# Altium PCB PCB.PcbDoc
Units mm, origin at the board's own origin, x right, y up, seen from the top; angles counter-clockwise.
Board outline 36 x 35 mm, 2 copper layers (Top Layer, Bottom Layer), stack 0.324 mm thick; 25 components, 36 nets, 102 pads, 19 vias.
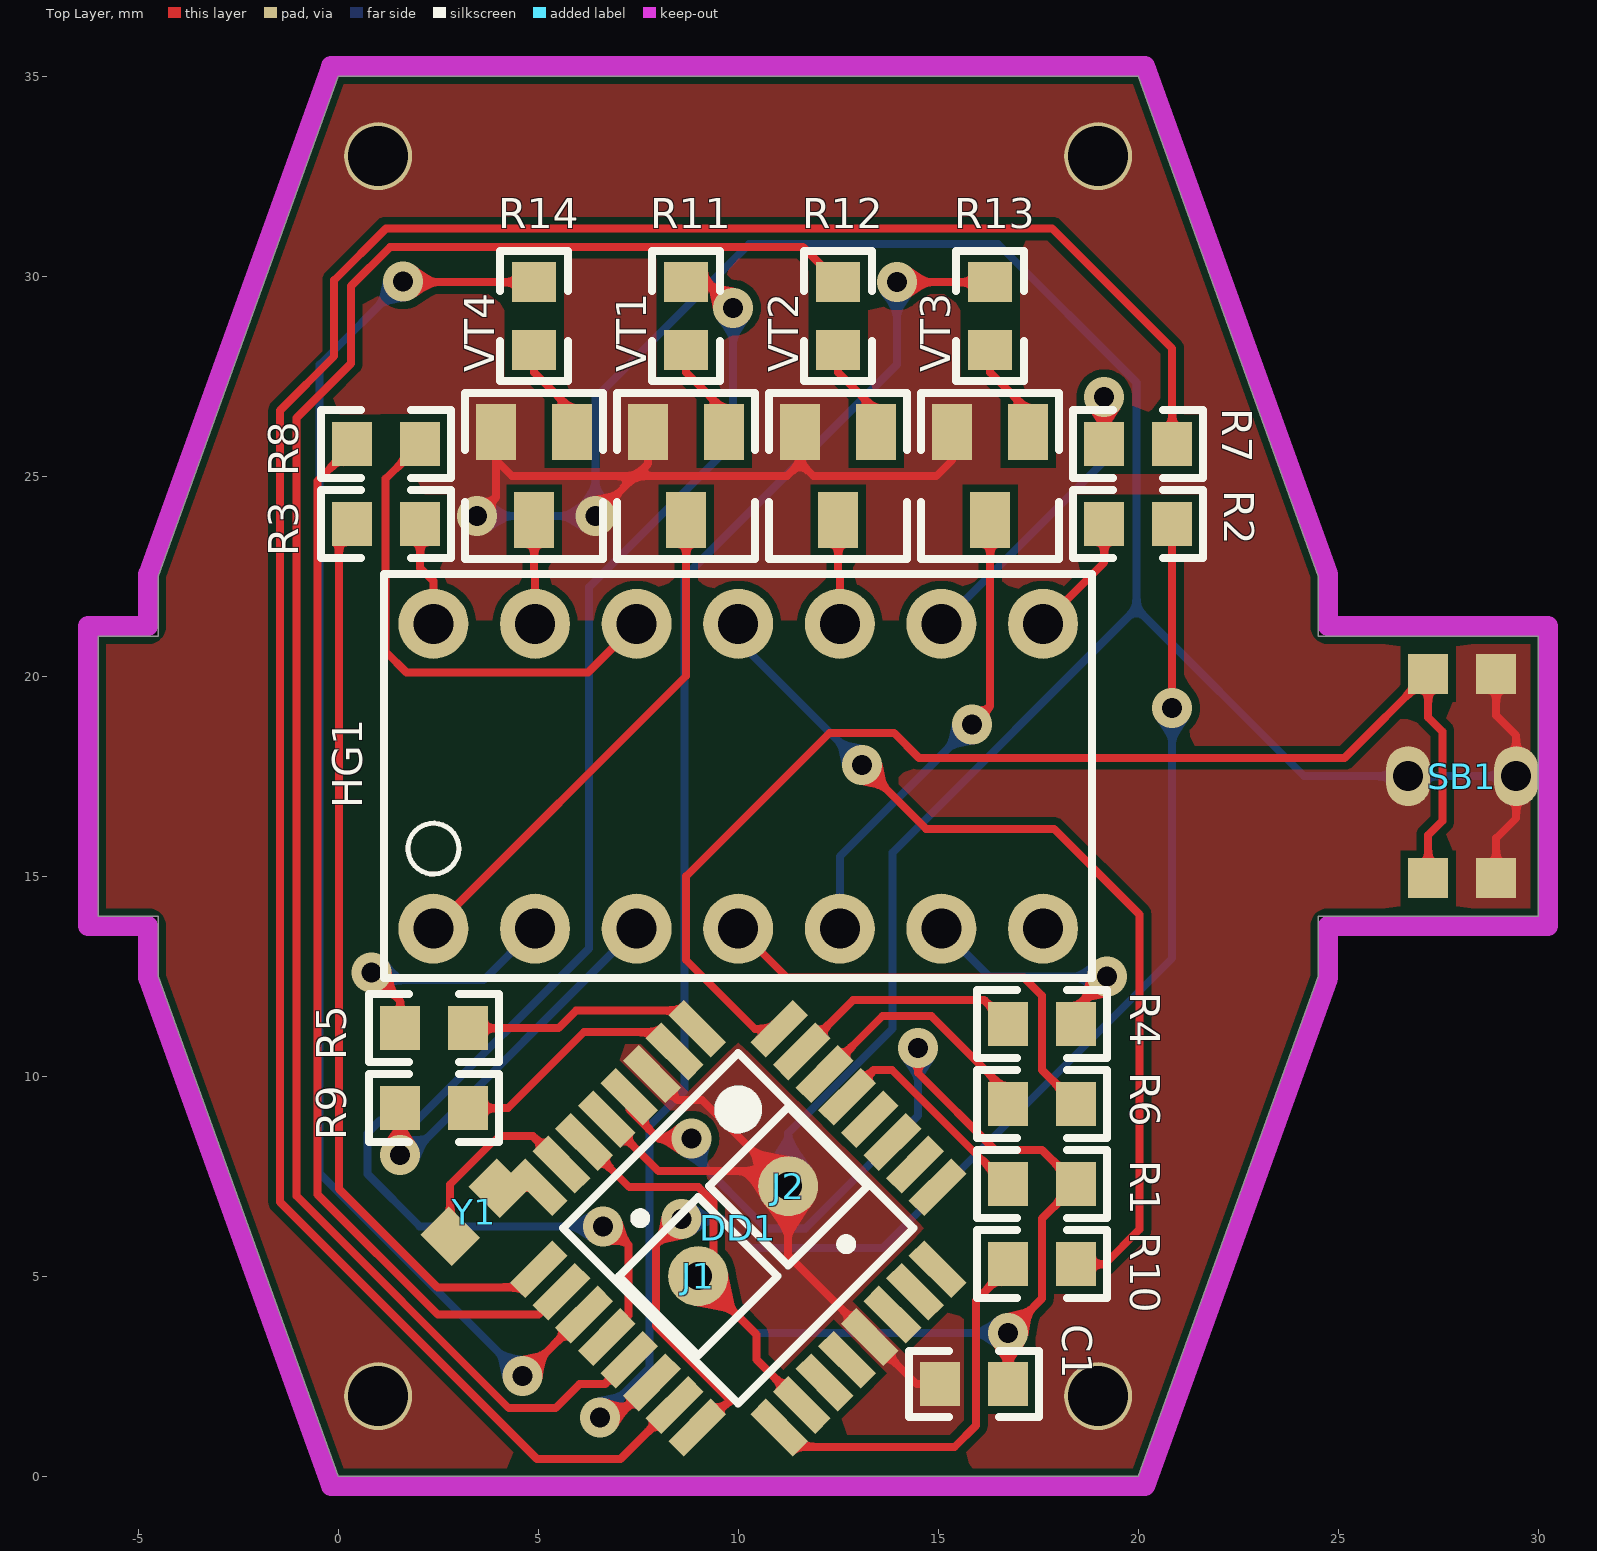
[diagram p0: Top Layer view]
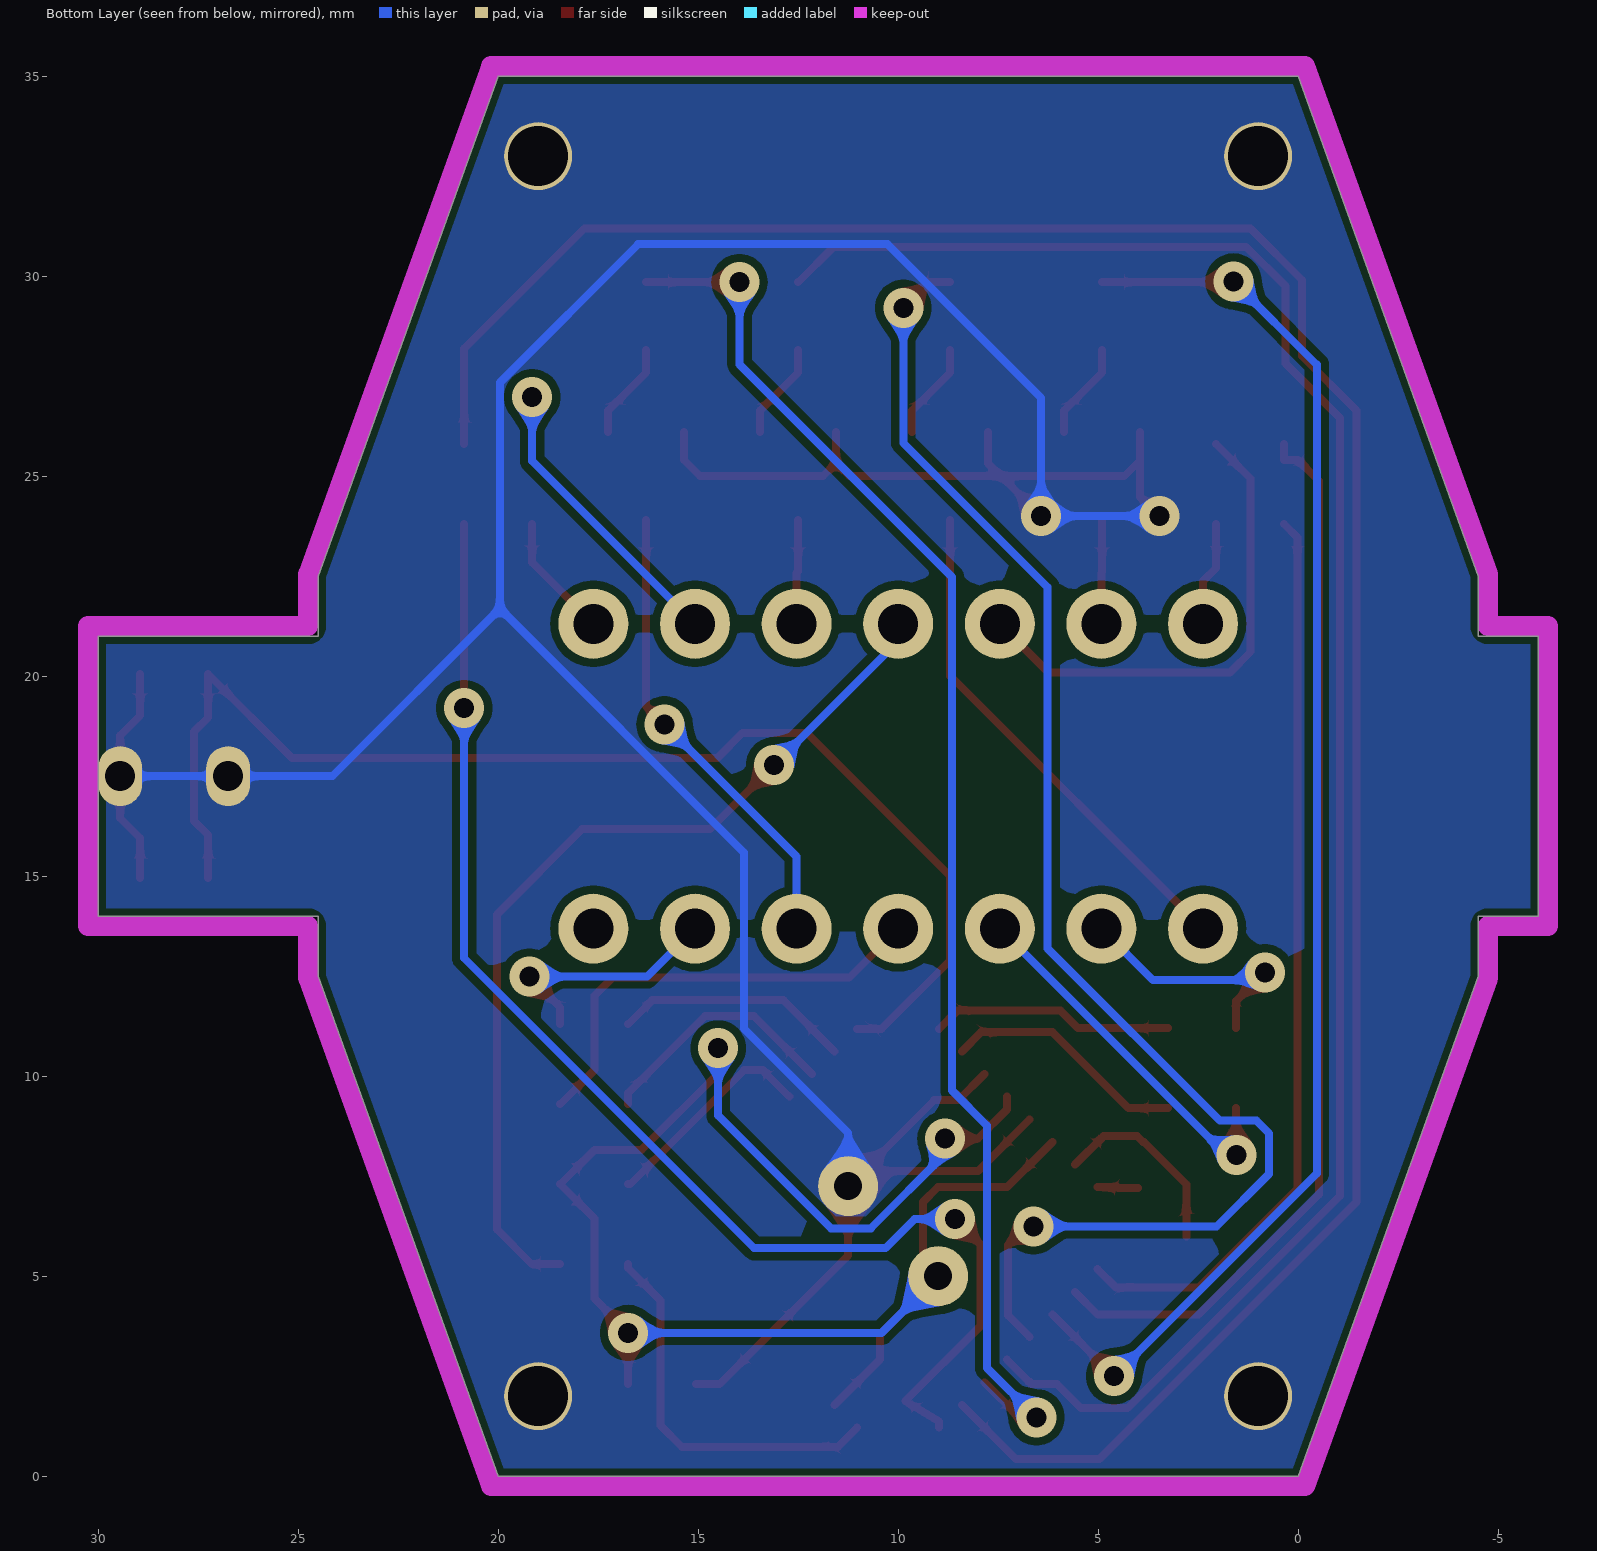
[diagram p1: Bottom Layer view, seen from below]

## Layer stack, top to bottom
Top Solder: solder mask 0.01, Solder Resist, Dk 3.5
Top Layer: signal copper 0.035
Dielectric 1: core 0.254, FR-4, Dk 4.2
Bottom Layer: signal copper 0.035
Bottom Solder: solder mask 0.01, Solder Resist, Dk 3.5

## Board outline
-6,14 -4.5,14 -4.5,12.5 0,0 20,0 24.5,12.5 24.5,14 30,14 30,21 24.5,21 24.5,22.5 20,35 0,35 -4.5,22.5 -4.5,21 -6,21

## Design rules (kind name [scope] priority, off if disabled: settings)
Clearance [All] p1: gap=0.2 except(0.35: Via-Via)
ComponentClearance [All] p1: gap=0.001 collisioncheckmode=3 verticalgap=0 showdistances=TRUE
PolygonConnect [All] p1: connectstyle=Direct reliefconductorwidth=0.254 reliefentries=4 polygonreliefangle="90 Angle" airgapwidth=0.254
RoutingVias [All] p1: holewidth=0.5 width=1 viastyle="Through Hole" minholewidth=0.5 minwidth=1 maxholewidth=1 maxwidth=2
SilkToSilkClearance [All] p1: silktosilkclearance=0.2
SolderMaskExpansion [All] p1: expansion=0.102
UnpouredPolygon [All] p1: allowunpoured=FALSE
ViasUnderSMD [All] p1: allowed=TRUE
Width [All] p1: maxlimit=1 minlimit=0.2 preferedwidth=0.2 minimp=50.000000 maximp=50.000000 favimp=50.000000
27 further rules are at their usual default settings.

## Components (designator, comment, footprint, x,y, rotation, side; value= is the part's Value field where it differs from the comment)
C1 "Ceramic Cap" "MLCC 0603 (1608)" 15.9,2.3 r0 top
DD1 "ATmega48" TQFP-32 10,6.2 r315 top
HG1 "GNQ-2841Cx/Dx" GNQ-2841CX/DX 10,17.5 r0 top
J1 "Vcc" PIN1 9,5 r45 top
J2 "GND" PIN1 11.25,7.25 r225 top
R1 "Chip Resistor" "Resistor 0603 (1208)" 17.6,7.3 r0 top
R2 "Chip Resistor" "Resistor 0603 (1208)" 20,23.8 r180 top
R3 "Chip Resistor" "Resistor 0603 (1208)" 1.2,23.8 r0 top
R4 "Chip Resistor" "Resistor 0603 (1208)" 17.6,11.3 r0 top
R5 "Chip Resistor" "Resistor 0603 (1208)" 2.4,11.2 r180 top
R6 "Chip Resistor" "Resistor 0603 (1208)" 17.6,9.3 r0 top
R7 "Chip Resistor" "Resistor 0603 (1208)" 20,25.8 r180 top
R8 "Chip Resistor" "Resistor 0603 (1208)" 1.2,25.8 r0 top
R9 "Chip Resistor" "Resistor 0603 (1208)" 2.4,9.2 r180 top
R10 "Chip Resistor" "Resistor 0603 (1208)" 17.6,5.3 r0 top
R11 "Chip Resistor" "Resistor 0603 (1208)" 8.7,29 r270 top
R12 "Chip Resistor" "Resistor 0603 (1208)" 12.5,29 r270 top
R13 "Chip Resistor" "Resistor 0603 (1208)" 16.3,29 r270 top
R14 "Chip Resistor" "Resistor 0603 (1208)" 4.9,29 r270 top
SB1 "IT-1189UE" ? 28.1,17.5 r90 top
VT1 "BC817-40" SOT-23 8.7,25 r180 top
VT2 "BC817-40" SOT-23 12.5,25 r180 top
VT3 "BC817-40" SOT-23 16.3,25 r180 top
VT4 "BC817-40" SOT-23 4.9,25 r180 top
Y1 "XTAL" "XTAL 32.768 KHZ 0603" 3.4,6.6 r225 top

## Footprints (in the part's own frame and the unit in brackets; to place one, negate y for a bottom-side part, rotate by r counter-clockwise, add the part's x,y. Pads: shape width x height; smd on the part's side, far side on the other; paste and mask are expansions set on the pad)
GNQ-2841CX/DX [mm] "Green 7 Segment Display x 4"
  round 1.75 hole 1: 1(-7.62,-3.81) 2(-5.08,-3.81) 3(-2.54,-3.81) 4(0,-3.81) 5(2.54,-3.81) 6(5.08,-3.81) 7(7.62,-3.81) 8(-7.62,3.81) 9(-5.08,3.81) 10(-2.54,3.81) 11(0,3.81) 12(2.54,3.81) 13(5.08,3.81) 14(7.62,3.81)
  silkscreen extent -8.85,-5.05 8.85,5.05, body extent -16.1,-5.05 16.1,5.05, height 4.7
"MLCC 0603 (1608)" [mm] "Ceramic Cap"
  rect 1x1.1 smd: 1(-0.85,0) 2(0.85,0)
  silkscreen extent -1.62,-0.82 1.63,0.83, body extent -0.8,-0.4 0.8,0.4, height 0.81
PIN1 [mm] "Connector; Plug"
  round 1.5 hole 0.7: 1(0,0)
  silkscreen extent -1.4,-1.4 1.4,2.17
"Resistor 0603 (1208)" [mm] "SMD Chip Resistor"
  rect 1x1.1 smd: 1(-0.85,0) 2(0.85,0)
  silkscreen extent -1.63,-0.85 1.63,0.85, body extent -0.8,-0.42 0.8,0.43, height 0.46
SOT-23 [mm]
  rect 1x1.4 smd: 1(-0.95,-1.1) 2(0.95,-1.1) 3(0,1.1)
  silkscreen extent -1.72,-2.07 1.72,2.07, body extent -1.45,-1.2 1.45,1.2, height 1
TQFP-32 [mm] "TQFP, 32-Leads"
  rect 1.5x0.55 smd: 1(-4.25,2.8) 2(-4.25,2) 3(-4.25,1.2) 4(-4.25,0.4) 5(-4.25,-0.4) 6(-4.25,-1.2) 7(-4.25,-2) 8(-4.25,-2.8) 17(4.25,-2.8) 18(4.25,-2) 19(4.25,-1.2) 20(4.25,-0.4) 21(4.25,0.4) 22(4.25,1.2) 23(4.25,2) 24(4.25,2.8)
  rect 0.55x1.5 smd: 9(-2.8,-4.25) 10(-2,-4.25) 11(-1.2,-4.25) 12(-0.4,-4.25) 13(0.4,-4.25) 14(1.2,-4.25) 15(2,-4.25) 16(2.8,-4.25) 25(2.8,4.25) 26(2,4.25) 27(1.2,4.25) 28(0.4,4.25) 29(-0.4,4.25) 30(-1.2,4.25) 31(-2,4.25) 32(-2.8,4.25)
  silkscreen extent -3.1,-3.1 3.1,3.1, body extent -4.5,-4.5 4.5,4.5, height 1.2
"XTAL 32.768 KHZ 0603" [mm] "2x6 mm XTAL 32.768 kHz"
  rect 1x1.1 smd: 1(-0.85,0) 2(0.85,0)
  body extent 0.63,0.65 2.62,6.65, height 1.99
? [mm] "SMD Tact Switch"
  rect 1x1 smd: 1(-2.55,0.85) 2(2.55,0.85) 3(-2.55,-0.85) 4(2.55,-0.85)
  oval 1.5x1.1 hole 0.75: ""(0,1.35) ""(0,-1.35)
  body extent -2.75,-2.8 2.75,1.8, height 1.6

## Part data
DD1: "8-bit AVR MCU"
HG1: "Green 7-segment display x 4"
J1 J2: library part Socket, "Socket"
R1 R2 R3 R4 R5 R6 R7 R8 R9 R10 R11 R12 R13 R14: library part Res2, "Resistor"
SB1: "SMD Tact Switch"
VT1 VT2 VT3 VT4: "NPN General Purpose Transistor"

## Free pads (board coordinates)
  round 1.7 hole 1.5: ""(1,2) ""(1,33) ""(19,2) ""(19,33)

## Via types
v1: diameter 1, hole 0.5, Top Layer to Bottom Layer, 19 vias

## Nets (pads, with @x,y where several pads share a name; then routed paths per layer and width w, separated by ;. In a path a pad name is that pad's centre, name@x,y a point inside that pad or via, vN(x,y) a via of type N, cw(c..) or ccw(c..) an arc to the next point about the centre after c; other vN are vias at no path point)
A: DD1.16 R2.1 | length 33.2
  Top Layer w0.2: v1(8.578,6.426) 7.943,5.791 7.943,3.759 9.823,1.88 8.975,1.372 DD1.16 ; v1(20.85,19.201) R2.1
  Bottom Layer w0.2: v1(8.578,6.426) 9.594,6.426 10.32,5.7 13.6,5.7 20.85,12.95 v1(20.85,19.201)
B: DD1.9 R3.1 | length 23
  Top Layer w0.2: R3.1 0.018,23.468 0.018,7.182 2.481,4.719 4.559,4.719 DD1.9
C: DD1.31 R4.1 | length 5.9
  Top Layer w0.2: DD1.31 12.872,11.9 16.15,11.9 R4.1
D: DD1.1 R5.1 | length 6.1
  Top Layer w0.2: R5.1 5.505,11.2 5.949,11.644 8.516,11.644 DD1.1
D5/6: DD1.17 R10.1 | length 9.7
  Top Layer w0.2: DD1.17 11.504,0.737 15.411,0.737 15.944,1.27 15.944,4.394 16.75,5.2 R10.1
DIG.1: DD1.12 R11.1 | length 37.2
  Top Layer w0.2: v1(6.622,6.248) 6.787,6.248 7.257,5.779 7.257,4.023 DD1.12 ; R11.1 9.234,29.85 v1(9.874,29.21)
  Bottom Layer w0.2: v1(6.622,6.248) 2.038,6.248 0.73,7.556 0.73,8.572 1.047,8.89 1.961,8.89 6.267,13.195 6.267,22.225 9.874,25.832 v1(9.874,29.21)
DIG.2: DD1.13 R12.1 | length 47.3
  Top Layer w0.2: DD1.13 6.666,2.3 6.031,2.3 5.431,1.7 4.266,1.7 -1.046,7.012 -1.046,26.457 0.318,27.821 0.318,29.753 1.3,30.734 11.616,30.734 R12.1
DIG.3: DD1.14 R13.1 | length 35.4
  Top Layer w0.2: v1(6.546,1.473) 6.97,1.473 DD1.14 ; v1(13.968,29.85) R13.1
  Bottom Layer w0.2: v1(6.546,1.473) 7.778,2.705 7.778,8.764 8.654,9.64 8.654,22.479 13.968,27.793 v1(13.968,29.85)
DIG.4: DD1.11 R14.1 | length 35.8
  Top Layer w0.2: v1(1.619,29.87) 1.639,29.85 R14.1 ; v1(4.604,2.501) DD1.11
  Bottom Layer w0.2: v1(1.619,29.87) -0.464,27.788 -0.464,7.568 v1(4.604,2.501)
DP: DD1.2 R9.1 | length 6.1
  Top Layer w0.2: R9.1 4.24,9.2 6.14,11.1 7.928,11.1 DD1.2
E: DD1.30 R6.1 | length 6.3
  Top Layer w0.2: DD1.30 13.603,11.5 14.831,11.5 16.75,9.581 R6.1
F: DD1.15 R7.1 | length 61.8
  Top Layer w0.2: DD1.15 7.06,0.432 4.968,0.432 -1.455,6.855 -1.455,26.645 -0.1,28 -0.1,29.9 1.191,31.191 17.849,31.191 20.85,28.19 R7.1
G: DD1.10 R8.1 | length 26.9
  Top Layer w0.2: R8.1 0.35,25.4 0,25.4 -0.515,24.885 -0.515,7.046 2.493,4.039 5.01,4.039 DD1.10
GND: C1.1 DD1.3 DD1.5 DD1.21 J2.1 pad. SB1. SB1.3 SB1.4 VT1.2 VT2.2 VT3.2 VT4.2 | length 99.8
  Top Layer w0.2: v1(3.473,24.003) 3.95,24.48 3.95,25.4 ; VT4.2 3.95,25.4 ; v1(6.429,24.003) 7.426,25 ; DD1.5 8.008,7.626 10.874,7.626 J2.1 ; VT1.2 7.75,25.324 7.426,25 ; DD1.3 8.497,9.4 9.1,9.4 J2.1 ; VT2.2 11.55,25.336 ; C1.1 14.466,2.3 11.25,5.516 J2.1 ; VT3.2 15.35,25.4 14.95,25 11.886,25 11.55,25.336 ; SB1.3 28.95,15.951 29.45,16.451 29.45,17.5 29.45,18.517 28.95,19.017 SB1.4 ; 3.95,25.4 4.35,25 7.426,25 ; 7.426,25 11.214,25 11.55,25.336
  Bottom Layer w0.2: v1(3.473,24.003) v1(6.429,24.003) 6.429,26.959 10.27,30.8 16.5,30.8 19.957,27.343 19.957,21.692 ; J2.1 11.25,8.581 13.861,11.193 13.861,15.596 19.957,21.692 ; 19.957,23.495 19.957,21.692 ; SB1.@29.45,17.5 26.75,17.5 24.149,17.5 19.957,21.692
NetDD1_7: DD1.7 Y1.2 | length 4.9
  Top Layer w0.2: Y1.2 2.799,7.299 3.85,8.35 3.874,8.35 4.026,8.502 4.87,8.502 DD1.7
NetDD1_8: DD1.8 Y1.1 | length 1
  Top Layer w0.2: Y1.1 4.489,7.201 4.513,7.225 DD1.8
NetDD1_29: DD1.29 R1.1 | length 5.5
  Top Layer w0.2: DD1.29 13.384,10.15 13.85,10.15 16.7,7.3 R1.1
NetDD1_32: DD1.32 SB1.1 SB1.2 | length 31.7
  Top Layer w0.2: DD1.32 10.415,11.185 8.7,12.9 8.7,15 12.287,18.587 13.892,18.587 14.521,17.958 25.158,17.958 SB1.2 27.25,18.971 27.603,18.618 27.603,16.38 27.25,16.027 SB1.1
NetHG1_1: HG1.1 VT1.3 | length 12.8
  Top Layer w0.2: HG1.1 8.7,20.01 VT1.3
NetHG1_2: HG1.2 R5.2 | length 6.4
  Top Layer w0.2: v1(0.831,12.599) 1.55,11.88 R5.2
  Bottom Layer w0.2: v1(0.831,12.599) 1.03,12.4 3.63,12.4 HG1.2
NetHG1_3: HG1.3 R9.2 | length 9.4
  Top Layer w0.2: v1(1.542,8.026) 1.55,8.034 R9.2
  Bottom Layer w0.2: v1(1.542,8.026) 1.796,8.026 HG1.3
NetHG1_4: HG1.4 R6.2 | length 11.4
  Top Layer w0.2: HG1.4 11.227,12.463 17.146,12.463 17.595,12.014 17.595,10.155 R6.2
NetHG1_5: HG1.5 VT3.3 | length 11.8
  Top Layer w0.2: v1(15.843,18.796) 16.3,19.253 VT3.3
  Bottom Layer w0.2: HG1.5 12.54,15.493 v1(15.843,18.796)
NetHG1_6: HG1.6 R4.2 | length 6.1
  Top Layer w0.2: R4.2 18.45,11.717 v1(19.221,12.488)
  Bottom Layer w0.2: HG1.6 16.282,12.488 v1(19.221,12.488)
NetHG1_8: HG1.8 R3.2 | length 2.6
  Top Layer w0.2: R3.2 2.05,22.707 2.38,22.377 HG1.8
NetHG1_9: HG1.9 VT4.3 | length 2.6
  Top Layer w0.2: VT4.3 4.9,22.601 4.92,22.581 HG1.9
NetHG1_10: HG1.10 R8.2 | length 12.5
  Top Layer w0.2: R8.2 1.187,24.937 1.187,20.612 1.707,20.091 6.241,20.091 HG1.10
NetHG1_11: HG1.11 R10.2 | length 23.1
  Top Layer w0.2: v1(13.099,17.78) 14.7,16.18 17.9,16.18 20.034,14.046 20.034,6.172 19.161,5.3 R10.2
  Bottom Layer w0.2: HG1.11 10,20.879 v1(13.099,17.78)
NetHG1_12: HG1.12 VT2.3 | length 2.6
  Top Layer w0.2: VT2.3 12.5,22.621 12.54,22.581 HG1.12
NetHG1_13: HG1.13 R7.2 | length 8.5
  Top Layer w0.2: R7.2 v1(19.15,26.975)
  Bottom Layer w0.2: HG1.13 19.15,25.38 v1(19.15,26.975)
NetHG1_14: HG1.14 R2.2 | length 3.1
  Top Layer w0.2: HG1.14 19.15,22.84 R2.2
NetR11_2: R11.2 VT1.1 | length 2.4
  Top Layer w0.2: R11.2 8.7,27.595 9.65,26.645 VT1.1
NetR12_2: R12.2 VT2.1 | length 2.4
  Top Layer w0.2: R12.2 12.5,27.595 13.45,26.645 VT2.1
NetR13_2: R13.2 VT3.1 | length 2.4
  Top Layer w0.2: R13.2 16.3,27.595 17.25,26.645 VT3.1
NetR14_2: R14.2 VT4.1 | length 2.4
  Top Layer w0.2: R14.2 4.9,27.595 5.85,26.645 VT4.1
VCC: C1.2 DD1.4 DD1.6 DD1.18 J1.1 R1.2 | length 42
  Top Layer w0.2: DD1.6 7.277,7.226 9.01,7.226 9.378,6.858 9.378,5.436 9,5.436 J1.1 10.456,3.544 10.456,2.916 DD1.18 ; DD1.4 7.278,9.17 8.01,8.437 v1(8.832,8.437) ; v1(14.5,10.7) 14.5,10.076 16.422,8.153 17.597,8.153 R1.2 17.595,6.445 17.595,4.445 v1(16.75,3.581) C1.2
  Bottom Layer w0.2: v1(8.832,8.437) 8.832,8.052 10.686,6.198 11.683,6.198 14.5,9.015 v1(14.5,10.7) ; J1.1 10.419,3.581 v1(16.75,3.581)
pads on no net: DD1.19 DD1.20 DD1.22 DD1.23 DD1.24 DD1.25 DD1.26 DD1.27 DD1.28 HG1.7

## Polygon pours and split planes (outlines as drawn)
GND on Top Layer "GND" (solid, remove dead copper, pour order 4): -7.2,36.2 32.7,36.2 33.1,35.8 32.2,34.9 32.2,-1.9 -11.1,-1.9 -11.2,-1.8
GND on Bottom Layer "GND2" (solid, remove dead copper, pour order 10): 33.78,39.12 33.24,38.58 33.24,-2.88 -7.86,-2.88 -10.68,-0.06 -9.36,1.26 -9.36,38.34

## Keep-outs
Keep-Out Layer:
  lines w0.5: -6.25,13.75 -6.25,21.25 -4.75,21.25 -4.75,22.55 -0.175,35.25 20.175,35.25 24.75,22.55 24.75,21.25 30.25,21.25 30.25,13.75 24.75,13.75 24.75,12.45 20.175,-0.25 -0.175,-0.25 -4.75,12.45 -4.75,13.75 -6.25,13.75

## Silkscreen, mask and mechanical layers (free items; w line width, h text height)
Mechanical 3:
  lines w0.25: 24.5,22.5 20,35 0,35 -4.5,22.5 -4.5,21 -6,21 -6,14 -4.5,14 -4.5,12.5 0,0 20,0 24.5,12.5 24.5,14 30,14 30,21 24.5,21 24.5,22.5 ; 24.5,22.5 24.5,22.5